# EAGLE board rc28c16rom (EAGLE 9.6.2)
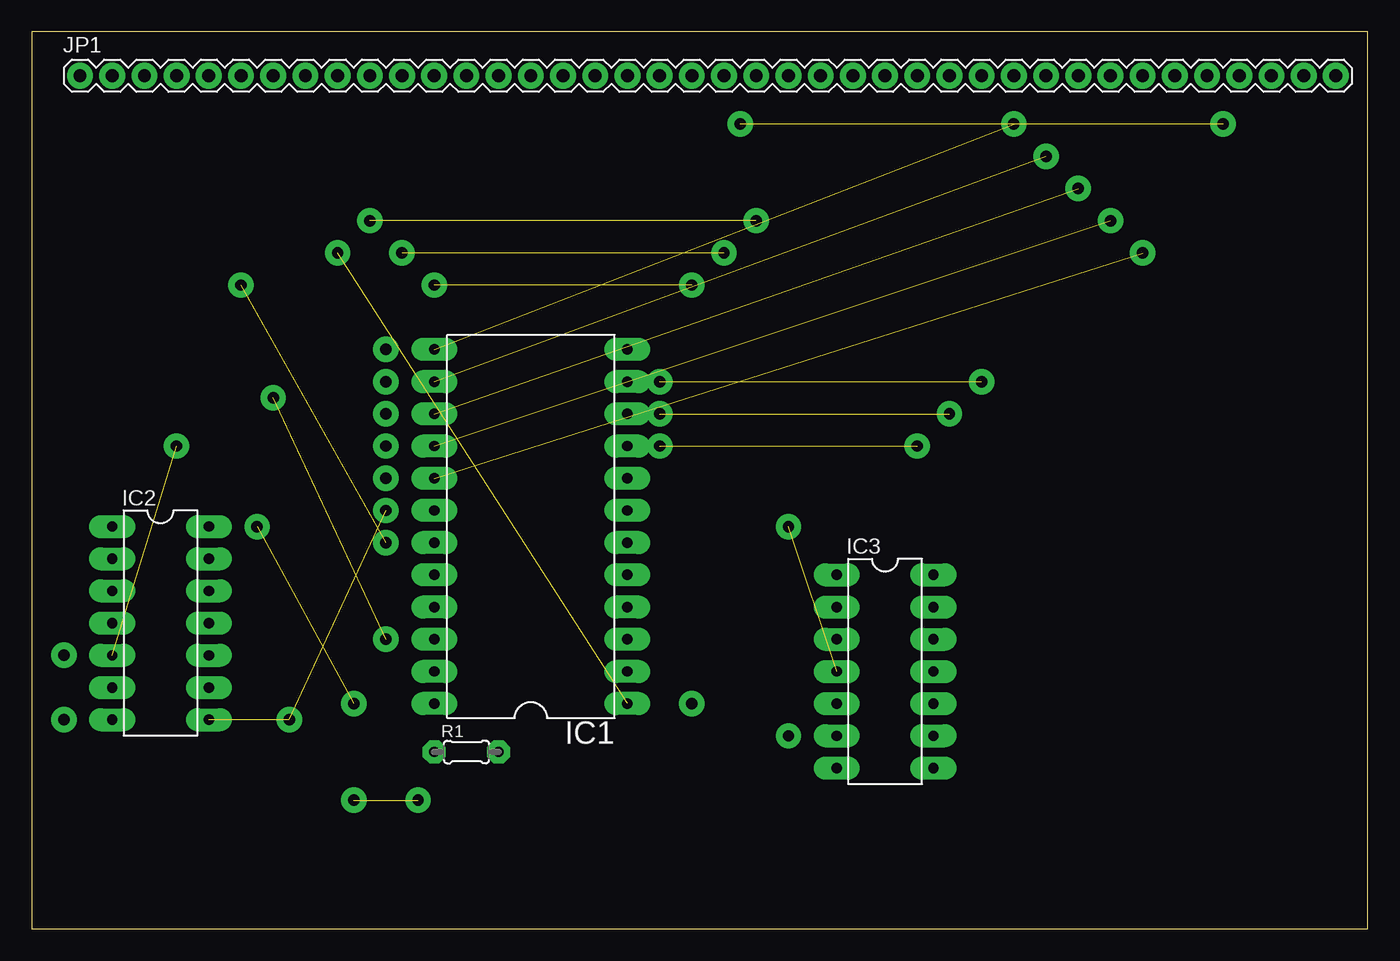
[diagram p0: board, top side]
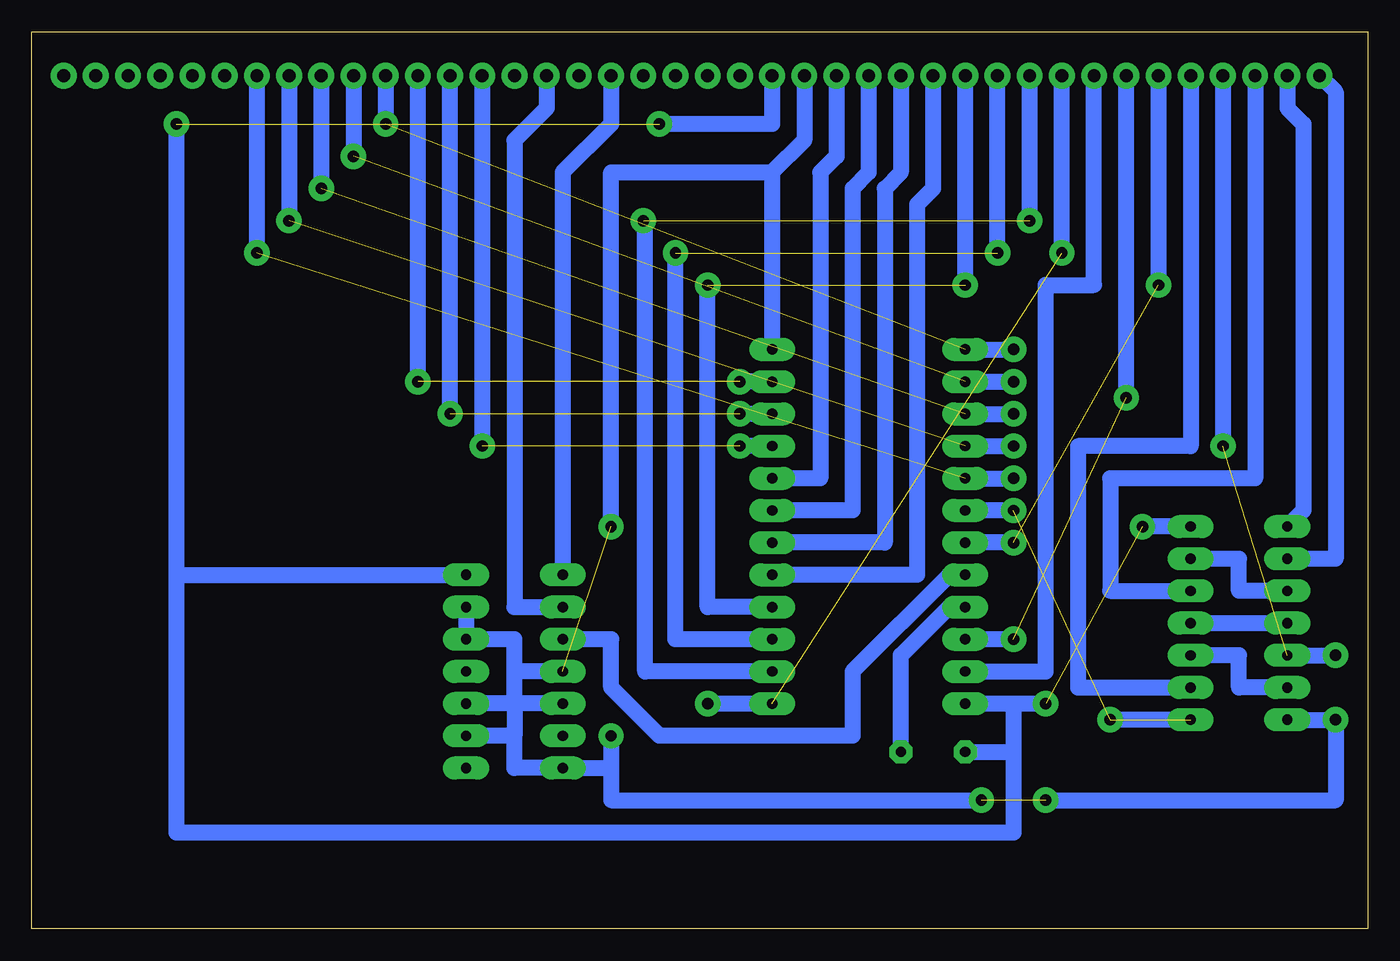
[diagram p1: board, bottom side, seen from below]

Size 105.39 x 70.79 mm. Coordinates in mm from the lower left corner, seen from the top.
Outline: 0,0 105.39,0 105.39,70.79 0,70.79 0,0
Copper layers (1*16): Top 0.035mm / dielectric 1.5mm / Bottom 0.035mm
Design rules "LabE": minimum track width 50mil, minimum drill 0.8mm, track to track 16mil, track to pad 16mil, pad to pad 16mil, via to via 16mil, smd to smd 16mil, copper to edge 0mil, drill to drill 16mil, minimum pad ring 20mil, minimum via ring 20mil, stop-mask expansion 4mil, vias tented up to drill 0mil, thermal gap 10mil

## Footprints (pad centres in the part's own frame; a part is rotated, then mirrored left to right if it is on the bottom)
DIL24-6 = drill 0.813 long: 1 -13.97,-7.62; 2 -11.43,-7.62; 3 -8.89,-7.62; 4 -6.35,-7.62; 5 -3.81,-7.62; 6 -1.27,-7.62; 7 1.27,-7.62; 8 3.81,-7.62; 9 6.35,-7.62; 10 8.89,-7.62; 11 11.43,-7.62; 12 13.97,-7.62; 13 13.97,7.62; 14 11.43,7.62; 15 8.89,7.62; 16 6.35,7.62; 17 3.81,7.62; 18 1.27,7.62; 19 -1.27,7.62; 20 -3.81,7.62; 21 -6.35,7.62; 22 -8.89,7.62; 23 -11.43,7.62; 24 -13.97,7.62
DIL14 = drill 0.813 long: 1 -7.62,-3.81; 2 -5.08,-3.81; 3 -2.54,-3.81; 4 0,-3.81; 5 2.54,-3.81; 6 5.08,-3.81; 7 7.62,-3.81; 8 7.62,3.81; 9 5.08,3.81; 10 2.54,3.81; 11 0,3.81; 12 -2.54,3.81; 13 -5.08,3.81; 14 -7.62,3.81
1X40 = drill 1.016: 1 -49.53,0; 2 -46.99,0; 3 -44.45,0; 4 -41.91,0; 5 -39.37,0; 6 -36.83,0; 7 -34.29,0; 8 -31.75,0; 9 -29.21,0; 10 -26.67,0; 11 -24.13,0; 12 -21.59,0; 13 -19.05,0; 14 -16.51,0; 15 -13.97,0; 16 -11.43,0; 17 -8.89,0; 18 -6.35,0; 19 -3.81,0; 20 -1.27,0; 21 1.27,0; 22 3.81,0; 23 6.35,0; 24 8.89,0; 25 11.43,0; 26 13.97,0; 27 16.51,0; 28 19.05,0; 29 21.59,0; 30 24.13,0; 31 26.67,0; 32 29.21,0; 33 31.75,0; 34 34.29,0; 35 36.83,0; 36 39.37,0; 37 41.91,0; 38 44.45,0; 39 46.99,0; 40 49.53,0
0204/5 = drill 0.813 octagon: 1 -2.54,0; 2 2.54,0

## Placement (x,y rotation side)
IC1  28C16AP  [DIL24-6]  39.37,31.75 90 top
IC2  74HCT32N  [DIL14]  10.16,24.13 270 top
IC3  74HCT32N  [DIL14]  67.31,20.32 270 top
JP1  [1X40]  53.34,67.31 0 top
R1  [0204/5]  34.29,13.97 0 top

## Library data of the parts
IC1 = microchip; MPN: CAT28C16ALI-12; OC_FARNELL: 1718292; OC_NEWARK: 06R0648
IC2 IC3 = 74xx-eu
JP1 = pinhead
R1 = rcl; SPICEPREFIX: R

## Nets
A0: IC1.8 JP1.16
A1: IC1.7 JP1.15
A2: IC1.6 JP1.14
A3: IC1.5 JP1.13
A4: IC1.4 JP1.12
A5: IC1.3 JP1.11
A6: IC1.2 JP1.10
A7: IC1.1 JP1.9
A8: IC1.23 JP1.8
A9: IC1.22 JP1.7
A10: IC1.19 JP1.6
A11: IC2.9 JP1.5
A12: IC2.5 JP1.4
A13: IC2.12 JP1.3
A14: IC2.1 JP1.2
A15: IC2.2 JP1.1
CE_L: IC1.18 IC2.8
CLK: JP1.21
D0: IC1.9 JP1.27
D1: IC1.10 JP1.28
D2: IC1.11 JP1.29
D3: IC1.13 JP1.30
D4: IC1.14 JP1.31
D5: IC1.15 JP1.32
D6: IC1.16 JP1.33
D7: IC1.17 JP1.34
GND: IC1.12 IC2.7 IC3.4 IC3.5 IC3.7 IC3.9 IC3.10 IC3.12 IC3.13 JP1.17
INT_L: JP1.22
IOREQ_L: JP1.26
M1_L: JP1.19
MREQ_L: IC3.1 JP1.23
N$1: JP1.37
N$2: JP1.38
N$3: JP1.39
N$4: IC2.6 IC2.10
N$5: IC2.3 IC2.13
N$6: IC2.4 IC2.11
OE_L: IC1.20 IC3.3
RD_L: IC3.2 JP1.25
RESET_L: JP1.20
RX: JP1.36
TX: JP1.35
VCC: IC1.24 IC2.14 IC3.14 JP1.18 R1.1
WE_L: IC1.21 R1.2
WR_L: JP1.24

## Tracks (layer width: path | path; a pad name or v marks a point on that pad's centre or on a via)
A0
  Bottom 1.27: IC1.8 43.18,35.56 43.18,59.69 41.91,60.96 JP1.16
A1
  Bottom 1.27: JP1.15 39.37,59.69 40.64,58.42 40.64,33.02 IC1.7
A2
  Bottom 1.27: JP1.14 36.83,59.69 38.1,58.42 38.1,30.48 IC1.6
A3
  Bottom 1.27: JP1.13 34.29,58.42 35.56,57.15 35.56,27.94 IC1.5
A4  (via drill 0.9 pad 2)  (1 unrouted)
  Bottom 1.27: IC1.4 52.07,25.4 v52.07,50.8 | v31.75,50.8 JP1.12
A5  (via drill 0.9 pad 2)  (1 unrouted)
  Bottom 1.27: IC1.3 54.61,22.86 v54.61,53.34 | v29.21,53.34 JP1.11
A6  (via drill 0.9 pad 2)  (1 unrouted)
  Bottom 1.27: IC1.2 57,20.32 57,55.73 v57.15,55.88 | v26.67,55.88 JP1.10
A7  (via drill 0.9 pad 2)  (1 unrouted)
  Bottom 1.27: v52.07,17.78 IC1.1 | v24.13,53.34 JP1.9
A8
  Bottom 1.27: IC1.23 25.4,20.32 25.4,50.8 21.59,50.8 JP1.8
A9  (via drill 0.9 pad 2)  (1 unrouted)
  Bottom 1.27: v27.94,22.86 IC1.22 | v19.05,41.91 JP1.7
A10  (via drill 0.9 pad 2)  (1 unrouted)
  Bottom 1.27: v27.94,30.48 IC1.19 | JP1.6 v16.51,50.8
A11
  Bottom 1.27: IC2.9 22.86,19.05 22.86,38.1 13.97,38.1 JP1.5
A12  (via drill 0.9 pad 2)  (1 unrouted)
  Bottom 1.27: JP1.4 v11.43,38.1 | IC2.5 v2.54,21.59
A13
  Bottom 1.27: JP1.3 8.89,35.56 20.32,35.56 20.32,26.67 IC2.12
A14
  Bottom 1.27: IC2.1 5.08,33.02 5.08,63.5 6.35,64.77 JP1.2
A15
  Bottom 1.27: JP1.1 2.54,66.04 2.54,29.21 IC2.2
CE_L  (via drill 0.9 pad 2)  (2 unrouted)
  Bottom 1.27: IC2.8 v20.32,16.51 | v27.94,33.02 IC1.18
D0  (via drill 0.9 pad 2)  (1 unrouted)
  Bottom 1.27: IC1.9 v49.53,38.1 | JP1.27 v69.85,38.1
D1  (via drill 0.9 pad 2)  (1 unrouted)
  Bottom 1.27: IC1.10 v49.53,40.64 | v72.39,40.64 JP1.28
D2  (via drill 0.9 pad 2)  (1 unrouted)
  Bottom 1.27: IC1.11 v49.53,43.18 | v74.93,43.18 JP1.29
D3  (via drill 0.9 pad 2)  (1 unrouted)
  Bottom 1.27: JP1.30 v77.47,63.5 | IC1.13 v27.94,45.72
D4  (via drill 0.9 pad 2)  (1 unrouted)
  Bottom 1.27: JP1.31 v80.01,60.96 | IC1.14 v27.94,43.18
D5  (via drill 0.9 pad 2)  (1 unrouted)
  Bottom 1.27: JP1.32 v82.55,58.42 | IC1.15 v27.94,40.64
D6  (via drill 0.9 pad 2)  (1 unrouted)
  Bottom 1.27: JP1.33 v85.09,55.88 | IC1.16 v27.94,38.1
D7  (via drill 0.9 pad 2)  (1 unrouted)
  Bottom 1.27: JP1.34 v87.63,53.34 | IC1.17 v27.94,35.56
GND  (via drill 0.9 pad 2)  (2 unrouted)
  Bottom 1.27: JP1.17 44.45,62.23 46.99,59.69 | 46.99,59.69 IC1.12 | v59.69,31.75 59.69,59.69 46.99,59.69 | IC2.7 v2.54,16.51 2.54,10.16 v25.4,10.16 | v30.48,10.16 59.69,10.16 59.69,12.7 | 59.69,12.7 IC3.7 67.31,12.7 67.31,15.24 | v59.69,15.24 59.69,12.7 | 67.31,15.24 IC3.9 | IC3.5 67.31,17.78 | 67.31,17.78 67.31,15.24 | 67.31,17.78 67.31,20.32 | 67.31,20.32 67.31,22.86 IC3.12 IC3.13 | IC3.4 67.31,20.32 | 67.31,17.78 IC3.10
MREQ_L
  Bottom 1.27: JP1.23 59.69,63.5 63.5,59.69 IC3.1
N$4
  Bottom 1.27: IC2.6 10.16,19.05 10.16,21.59 IC2.10
N$5
  Bottom 1.27: IC2.3 10.16,26.67 10.16,29.21 IC2.13
N$6
  Bottom 1.27: IC2.11 IC2.4
OE_L
  Bottom 1.27: IC1.20 33.02,27.94 40.64,20.32 40.64,15.24 55.88,15.24 59.69,19.05 59.69,22.86 IC3.3
RD_L
  Bottom 1.27: JP1.25 64.77,64.77 67.31,62.23 67.31,25.4 IC3.2
VCC  (via drill 0.9 pad 2)  (2 unrouted)
  Bottom 1.27: JP1.18 46.99,63.5 v55.88,63.5 | v93.98,63.5 93.98,27.94 | 93.98,27.94 IC3.14 | 93.98,27.94 93.98,7.62 27.94,7.62 27.94,13.97 | IC2.14 v17.78,31.75 | IC1.24 27.94,17.78 | 27.94,17.78 v25.4,17.78 | 27.94,17.78 27.94,13.97 | R1.1 27.94,13.97
WE_L
  Bottom 1.27: R1.2 36.83,21.59 33.02,25.4 IC1.21